# Altium PCB RC car PCB.PcbDoc
Units mm, origin at the board's own origin, x right, y up, seen from the top; angles counter-clockwise.
Board outline 152.4 x 24.77 mm, 2 copper layers (Top Layer, Bottom Layer); 34 components, 27 nets, 120 pads, 0 vias.
Unrouted connection lines stored in the file: 69.
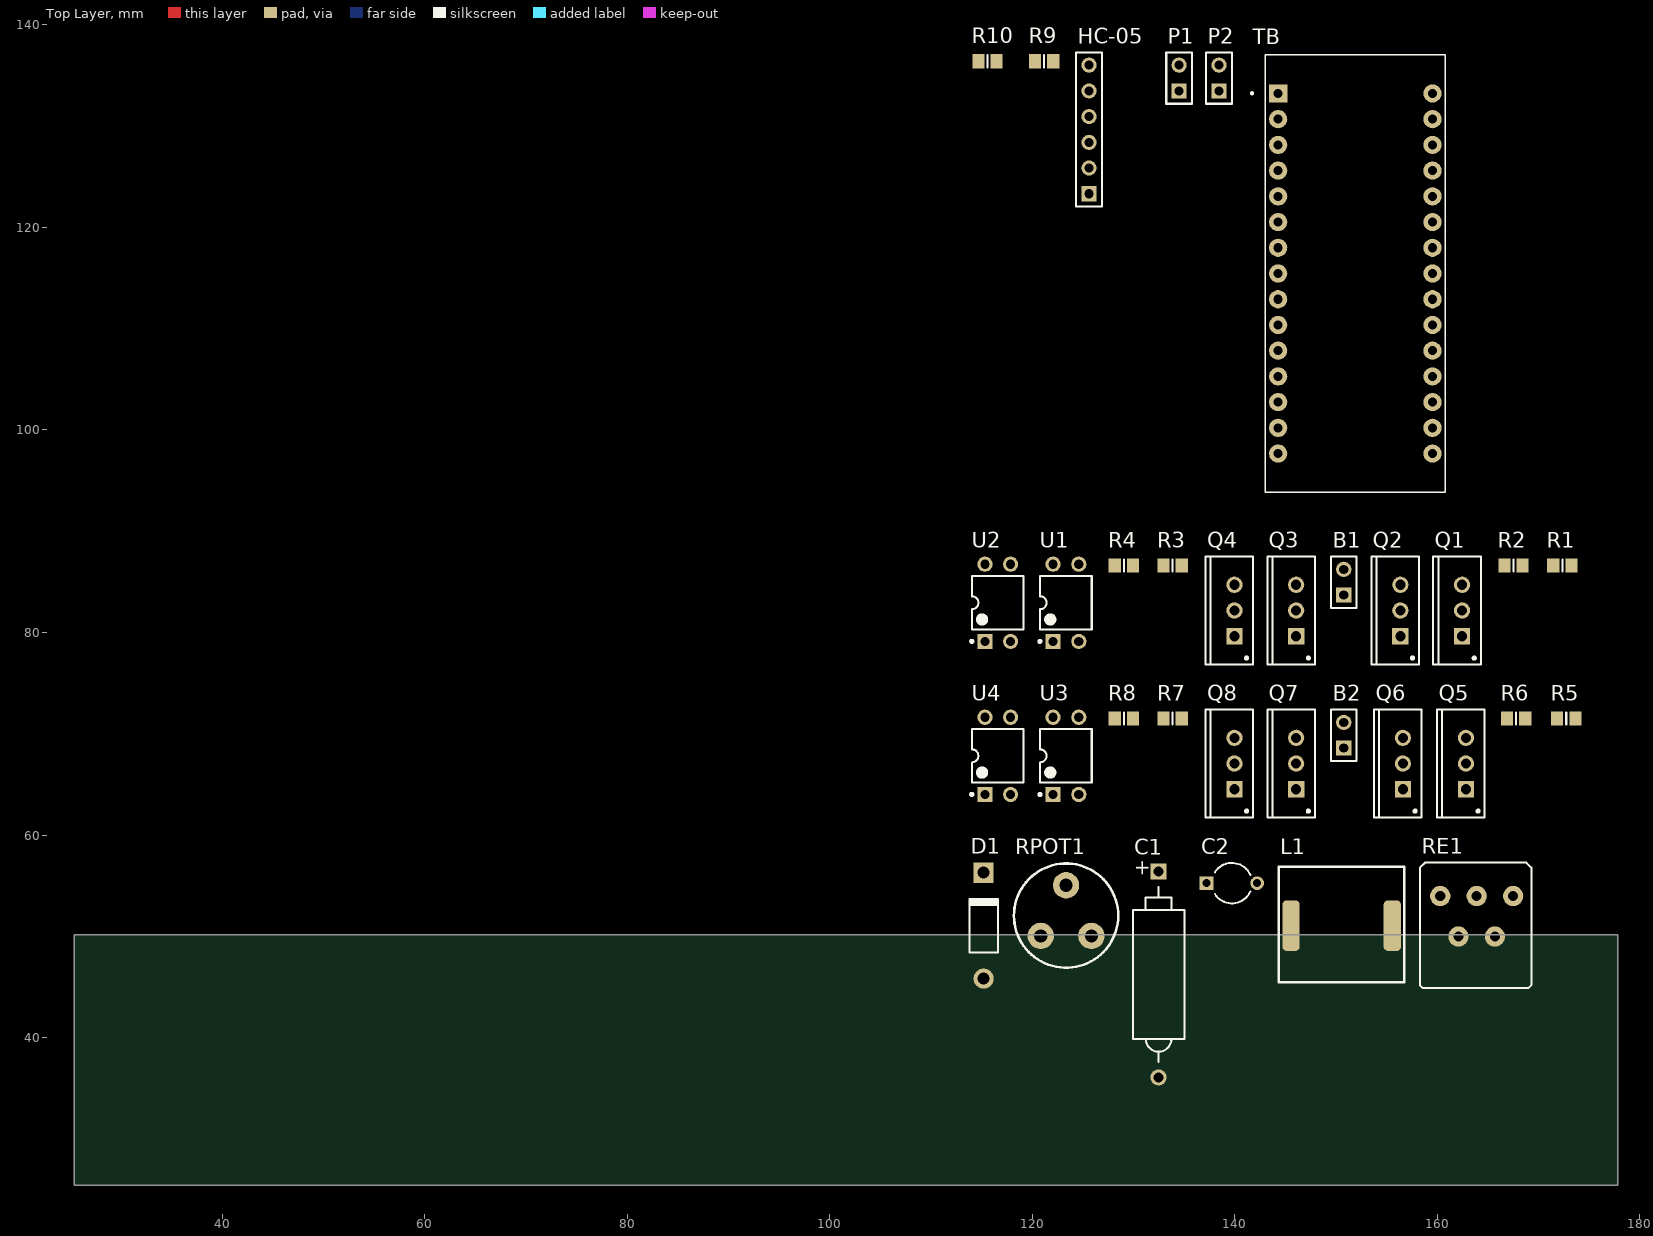
[diagram p0: Top Layer view]
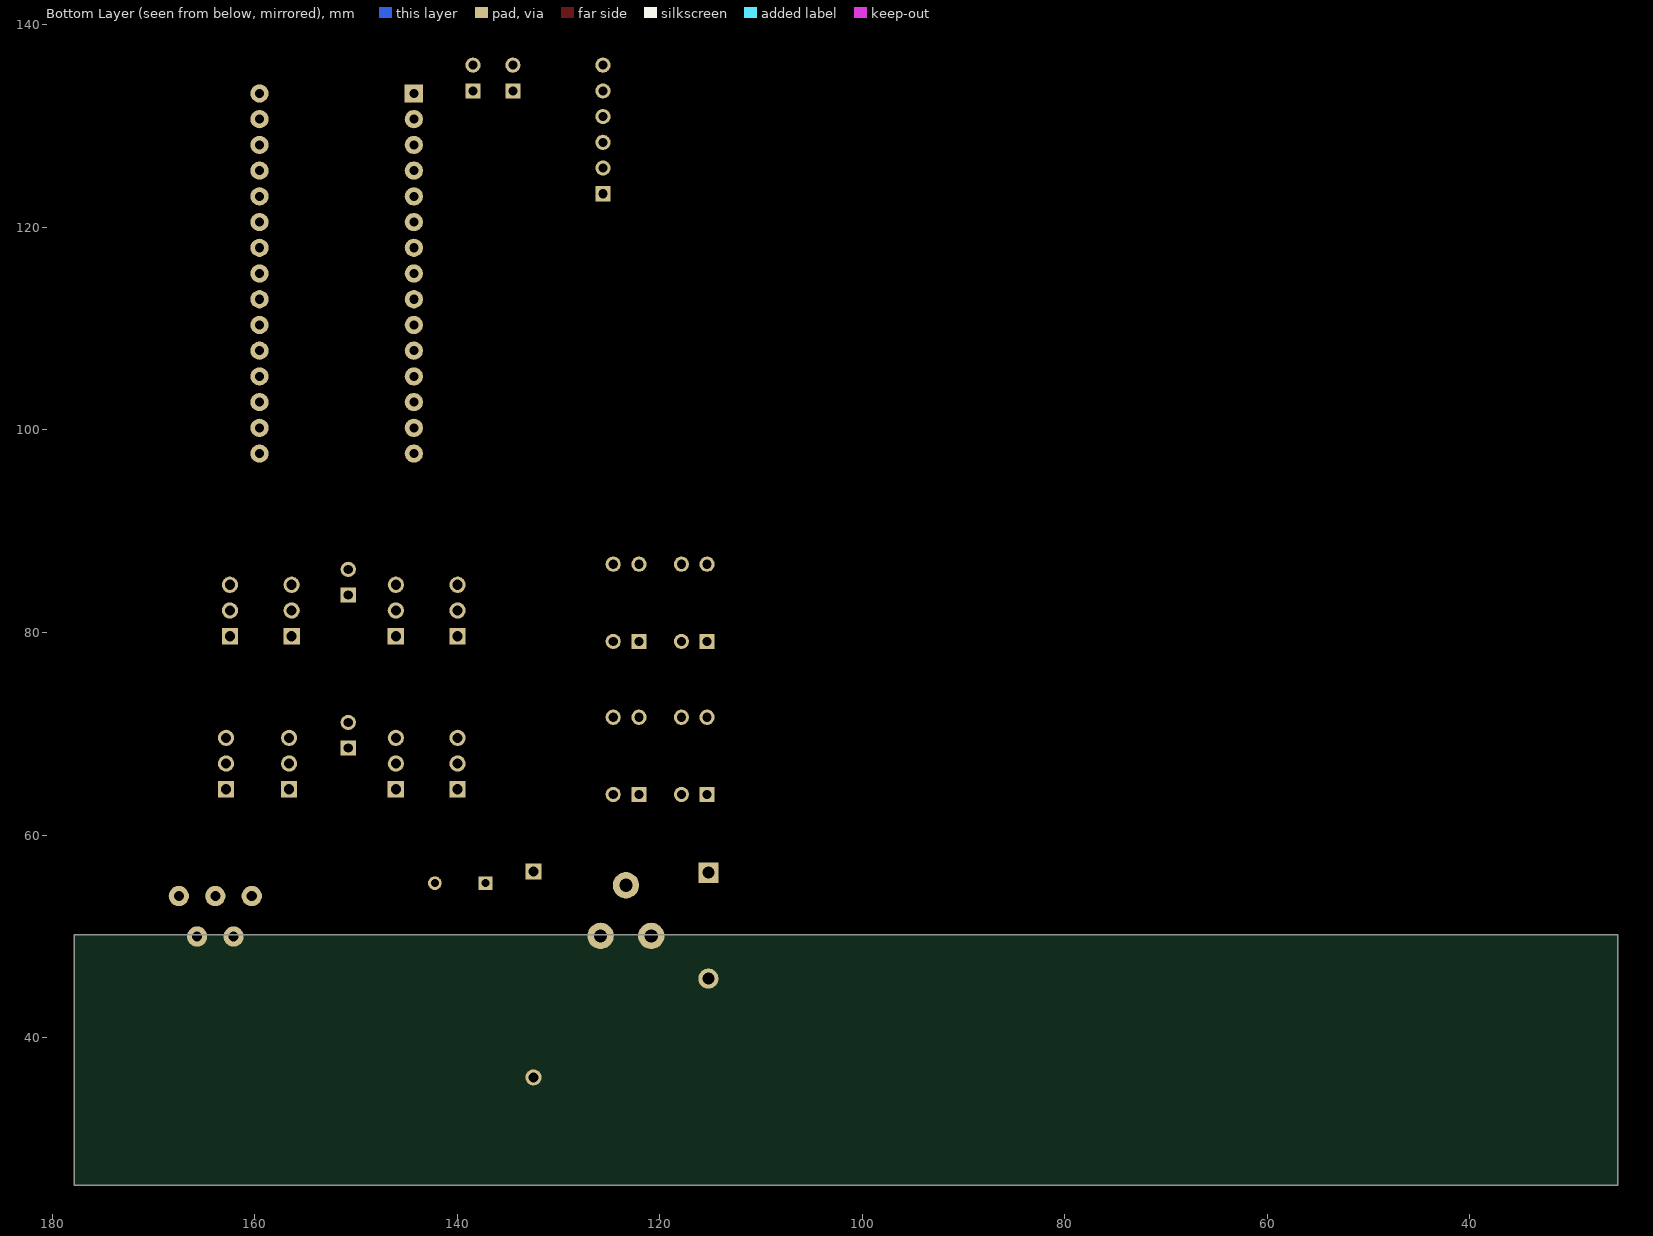
[diagram p1: Bottom Layer view, seen from below]

## Layer stack, top to bottom
Top Solder: solder mask 0.0102, Solder Resist, Dk 3.5
Top Layer: signal copper 0.0356
Dielectric 1: dielectric 0.32, FR-4, Dk 4.8
Bottom Layer: signal copper 0.0356
Bottom Solder: solder mask 0.0102, Solder Resist, Dk 3.5

## Board outline
25.4,25.4 177.8,25.4 177.8,50.165 25.4,50.165

## Design rules (kind name [scope] priority, off if disabled: settings)
Clearance [All] p1: gap=0.254 ignorepadtopadclearanceinfootprint=FALSE except(0: Arc-Hole Track-Hole SMDPad-Hole THPad-Hole Via-Hole Fill-Hole Poly-Hole Region-Hole Text-Hole)
PolygonConnect [All] p1: connectstyle=Relief reliefconductorwidth=0.254 reliefentries=4 polygonreliefangle="90 Angle" airgapwidth=0.254
RoomDefinition "RC Brain Sch" [InComponentClass('RC Brain Sch')] p1: confinementstyle=ConfineIn formatcopy=TRUE lockcomponents=FALSE outline 113.538,91.44 161.29,91.44 161.29,140.081 113.538,140.081
RoomDefinition "H-Bridge turning Sch" [InComponentClass('H-Bridge turning Sch')] p2: confinementstyle=ConfineIn formatcopy=TRUE lockcomponents=FALSE outline 113.538,76.581 174.371,76.581 174.371,90.297 113.538,90.297
RoomDefinition "H-Bridge drive Sch" [InComponentClass('H-Bridge drive Sch')] p3: confinementstyle=ConfineIn formatcopy=TRUE lockcomponents=FALSE outline 113.538,61.468 174.752,61.468 174.752,75.184 113.538,75.184
RoomDefinition "Buck_Converter Sch" [InComponentClass('Buck_Converter Sch')] p4: confinementstyle=ConfineIn formatcopy=TRUE lockcomponents=FALSE outline 113.538,34.925 169.545,34.925 169.545,60.071 113.538,60.071
RoutingVias [All] p1: holewidth=0.711 width=1.27 viastyle="Through Hole" minholewidth=0.711 minwidth=1.27 maxholewidth=0.711 maxwidth=1.27
SolderMaskExpansion [All] p1: expansion=0.102
Width [All] p1: maxlimit=0.254 minlimit=0.254 preferedwidth=0.254
30 further rules are at their usual default settings.

## Classes and differential pairs
component class "RC Brain Sch": HC-05 P1 P2 R9 R10 TB
component class "H-Bridge turning Sch": B1 Q1 Q2 Q3 Q4 R1 R2 R3 R4 U1 U2
component class "H-Bridge drive Sch": B2 Q5 Q6 Q7 Q8 R5 R6 R7 R8 U3 U4
component class "Buck_Converter Sch": C1 C2 D1 L1 RE1 RPOT1

## Components (designator, comment, footprint, x,y, rotation, side; value= is the part's Value field where it differs from the comment)
B1 "Motor" HDR1X2 150.749,83.693 r90 top
B2 "Motor" HDR1X2 150.749,68.58 r90 top
C1 "Cap Pol2" POLAR0.8 132.461,46.228 r90 top value=1mF
C2 "Cap2" CAPR5-4X5 139.7,55.245 r0 top value=100uF
D1 "Diode 11DQ03" DO-204AL 115.189,51.054 r90 top
HC-05 "Header" HDR1X6 125.603,123.317 r90 top
L1 "Inductor SMD 100 uH" "Inductor 100uH" 145.542,51.054 r0 top
P1 "Jumper" HDR1X2 134.493,133.477 r90 top
P2 "Jumper" HDR1X2 138.43,133.477 r90 top
Q1 "PMOS-2" TO-220AB 162.433,82.169 r90 top
Q2 "PMOS-2" TO-220AB 156.337,82.169 r90 top
Q3 "NMOS-2" TO-220AB 146.05,82.169 r90 top
Q4 "NMOS-2" TO-220AB 139.954,82.169 r90 top
Q5 "PMOS-2" TO-220AB 162.814,67.056 r90 top
Q6 "PMOS-2" TO-220AB 156.591,67.056 r90 top
Q7 "NMOS-2" TO-220AB 146.05,67.056 r90 top
Q8 "NMOS-2" TO-220AB 139.954,67.056 r90 top
R1 "Res1" 6-0805_N 172.339,86.614 r0 top value=10k
R2 "Res1" 6-0805_N 167.513,86.614 r0 top value=10k
R3 "Res1" 6-0805_N 133.858,86.614 r0 top value=330
R4 "Res1" 6-0805_N 129.032,86.614 r0 top value=330
R5 "Res1" 6-0805_N 172.72,71.501 r0 top value=10k
R6 "Res1" 6-0805_N 167.767,71.501 r0 top value=10k
R7 "Res1" 6-0805_N 133.858,71.501 r0 top value=330
R8 "Res1" 6-0805_N 129.032,71.501 r0 top value=330
R9 "Res1" 6-0805_N 121.158,136.398 r0 top value=1.8k
R10 "Res1" 6-0805_N 115.57,136.398 r0 top value=1k
RE1 "LM2576HV" LM2576 160.274,53.975 r0 top
RPOT1 "Potentiometer" "Potentiometer 10k" 125.73,50.038 r0 top
TB "ARDUINO_NANO" *SHIELD_ARDUINO_NANO 151.892,115.443 r0 top
U1 "Optoisolator1" DIP-4 123.317,82.931 r90 top
U2 "Optoisolator1" DIP-4 116.586,82.931 r90 top
U3 "Optoisolator1" DIP-4 123.317,67.818 r90 top
U4 "Optoisolator1" DIP-4 116.586,67.818 r90 top

## Footprints (in the part's own frame and the unit in brackets; to place one, negate y for a bottom-side part, rotate by r counter-clockwise, add the part's x,y. Pads: shape width x height; smd on the part's side, far side on the other; paste and mask are expansions set on the pad)
6-0805_N [mm] "Chip Resistor, Body 2.0x1.2mm, IPC Medium Density"
  rect 1.2x1.4 smd: 1(-0.9,0) 2(0.9,0)
  silkscreen extent 0,-0.6 0,0.6, body extent -1.07,-0.7 1.07,0.7, height 0.7
*SHIELD_ARDUINO_NANO [mm]
  rect 1.8x1.8 hole 0.9: 1(-7.62,17.78)
  round 1.8 hole 0.9: 2(-7.62,15.24) 3(-7.62,12.7) 4(-7.62,10.16) 5(-7.62,7.62) 6(-7.62,5.08) 7(-7.62,2.54) 8(-7.62,0) 9(-7.62,-2.54) 10(-7.62,-5.08) 11(-7.62,-7.62) 12(-7.62,-10.16) 13(-7.62,-12.7) 14(-7.62,-15.24) 15(-7.62,-17.78) 16(7.62,-17.78) 17(7.62,-15.24) 18(7.62,-12.7) 19(7.62,-10.16) 20(7.62,-7.62) 21(7.62,-5.08) 22(7.62,-2.54) 23(7.62,0) 24(7.62,2.54) 25(7.62,5.08) 26(7.62,7.62) 27(7.62,10.16) 28(7.62,12.7) 29(7.62,15.24) 30(7.62,17.78)
  silkscreen extent -10.3,-21.59 8.89,21.59, body extent -9.2,21.8 -9.2,21.8, height 0.25
CAPR5-4X5 [mm] "Capacitor; 2 Leads"
  rect 1.35x1.35 hole 0.8: 1(-2.5,0)
  round 1.35 hole 0.8: 2(2.5,0)
  silkscreen extent -1.69,-2 1.82,2
DIP-4 [mm] "DIP; 4 Leads; Row Spacing 7.62 mm; Pitch 2.54 mm"
  rect 1.5x1.5 hole 0.9: 1(-3.81,1.27)
  round 1.5 hole 0.9: 2(-3.81,-1.27) 3(3.81,-1.27) 4(3.81,1.27)
  silkscreen extent -3.93,-2.55 2.65,2.69, body extent -3.15,-2.5 3.15,2.5, height 5.6
DO-204AL [mm] "Diode, Axial; Body 5.2 x 2.7 mm (LxDia. max), Lead Dia. 0.86 mm (max)"
  round 2 hole 1.2: 1(-5.23,0)
  rect 2x2 hole 1.2: 2(5.23,0)
  silkscreen extent -2.65,-1.4 2.75,1.4
HDR1X2 [mm] "Connector; Header; 2 Position"
  rect 1.5x1.5 hole 0.9: 1(0,0)
  round 1.5 hole 0.9: 2(2.54,0)
  silkscreen extent -1.27,-1.27 3.81,1.27
HDR1X6 [mm] "Connector; Header; 6 Position"
  rect 1.5x1.5 hole 0.9: 1(0,0)
  round 1.5 hole 0.9: 2(2.54,0) 3(5.08,0) 4(7.62,0) 5(10.16,0) 6(12.7,0)
  silkscreen extent -1.27,-1.27 13.97,1.27
"Inductor 100uH" [mm] "Inductor 100uH"
  rrect50% 1.7x5 smd: 1(0,0) 1(10,0)
  silkscreen extent -1.2,-5.6 11.2,5.8, body extent -1.25,-6.25 11.25,6.25, height 8.3
LM2576 [mm]
  round 2 hole 1: 1(0,0) 2(1.8,-4) 3(3.6,0) 4(5.4,-4) 5(7.2,0)
  silkscreen extent -2,-9.1 9,3.3, body extent -2,-8 9.1,0.43, height 18
POLAR0.8 [mm] "Polarized Capacitor; 2 Leads"
  rect 1.6x1.6 hole 1: 1(10.16,0)
  round 1.6 hole 1: 2(-10.16,0)
  silkscreen extent -8.64,-2.54 8.64,2.54
"Potentiometer 10k" [mm] "Potentiometer 10k"
  round 2.6 hole 1.3: 1(-4.9,0) 2(0.1,0) 3(-2.4,5)
  silkscreen extent -7.55,-3.15 2.75,7.15, body extent -7.5,-3.3 2.8,7.3, height 6.26
TO-220AB [mm] "TO, Thru-Hole, Vertical, Heatsink Mounted; 3 In-Line Leads; Pitch 2.54 mm"
  rect 1.6x1.6 hole 1: 1(-2.54,0)
  round 1.6 hole 1: 2(0,0) 3(2.54,0)
  silkscreen extent -5.35,-1.85 5.35,2.85, body extent -5.4,-1.9 5.4,2.9, height 19.3

## Part data
B1 B2: "Motor, General Kind", LatestRevisionDate=17-Jul-2002, LatestRevisionNote="Re-released for DXP Platform.", PackageDescription="Capacitor (Radial); 2 Leads", PackageReference=RB5-10.5, Published=24-Mar-1999, Publisher="Altium Limited"
C1: "Polarized Capacitor (Axial)", LatestRevisionDate=17-Jul-2002, LatestRevisionNote="Re-released for DXP Platform.", PackageDescription="Polarized Capacitor; 2 Leads", PackageReference=POLAR0.8, Published=8-Jun-2000, Publisher="Altium Limited"
C2: "Capacitor", PackageDescription="Capacitor; 2 Leads", PackageReference=CAPR5-4X5, Published=23-Sep-2002, Publisher="Altium Limited"
D1: "Schottky Rectifier", Code_JEDEC=DO-204-AL, ComponentLink1Description="Manufacturer Link", ComponentLink1URL=http://www.irf.com/, ComponentLink2Description=Datasheet, ComponentLink2URL=http://www.irf.com/product-info/datasheets/data/11dq03.pdf, DatasheetVersion=Dec-1997, LatestRevisionDate=17-Jul-2002, LatestRevisionNote="Re-released for DXP Platform.", PackageDescription="Diode, Axial; Body 5.2 x 2.7 mm (LxDia. max), Lead Dia. 0.86 mm (max)", PackageReference=DO-204AL, Published=8-Jun-2000, Publisher="Altium Limited"
HC-05: library part "Header 6", "Header, 6-Pin", LatestRevisionDate=17-Jul-2002, LatestRevisionNote="Re-released for DXP Platform.", Publisher="Altium Limited"
P1 P2: library part "Header 2", "Header, 2-Pin", LatestRevisionDate=17-Jul-2002, LatestRevisionNote="Re-released for DXP Platform.", Publisher="Altium Limited"
Q1 Q2 Q5 Q6: "P-Channel Power MOSFET", ComponentLink1Description="Manufacturer Link", ComponentLink1URL=http://www.irf.com/, DatasheetVersion=PD-9.390D, LatestRevisionDate=17-Jul-2002, LatestRevisionNote="Re-released for DXP Platform.", Note="Pin 4 not drawn and electrically connected to Pin 2.", PackageDescription="TO, Thru-Hole, Vertical, Heatsink Mounted; 3 In-Line Leads; Pitch 2.54 mm", PackageReference=TO-220AB, PackageVersion=Feb-1997, Published=8-Jun-2000, Publisher="Altium Limited"
Q3 Q4 Q7 Q8: "N-Channel Power MOSFET", ComponentLink1Description="Manufacturer Link", ComponentLink1URL=http://www.irf.com/, DatasheetVersion=PD-9.814, LatestRevisionDate=17-Jul-2002, LatestRevisionNote="Re-released for DXP Platform.", Note="Pin 2 is electrically connected to pin 4.", PackageDescription="TO, Thru-Hole, Vertical, Heatsink Mounted; 3 In-Line Leads; Pitch 2.54 mm", PackageReference=TO-220AB, PackageVersion=Feb-1997, Published=8-Jun-2000, Publisher="Altium Limited"
R1 R2 R3 R4 R5 R6 R7 R8 R9 R10: "Resistor", LatestRevisionDate=17-Jul-2002, LatestRevisionNote="Re-released for DXP Platform.", PackageDescription="Axial Device, Thru-Hole; 2 Leads; 0.3 in Pin Spacing", PackageReference=AXIAL-0.3, Published=8-Jun-2000, Publisher="Altium Limited"
RPOT1: "potentiometer 10k"
TB: "ATmega328 Arduino Nano AVR® ATmega AVR MCU 8-Bit Embedded Evaluation Board", Package=None, Availability=Unavailable, MF=Arduino, MP="ARDUINO NANO", Price=None, SnapEDA_Link=https://www.snapeda.com/parts/ARDUINO%20NANO/Arduino/view-part/1128261/?ref=snap
U1 U2 U3 U4: "4-Pin Phototransistor Optocoupler", DatasheetVersion=Nov-2003, LatestRevisionDate=04-Mar-2005, LatestRevisionNote="Sch pins 3 & 4 Swapped.", PackageReference=DIP-4, Published=24-Mar-1999, Publisher="Altium Limited"

## Nets (pads, with @x,y where several pads share a name; then routed paths per layer and width w, separated by ;. In a path a pad name is that pad's centre, name@x,y a point inside that pad or via, vN(x,y) a via of type N, cw(c..) or ccw(c..) an arc to the next point about the centre after c; other vN are vias at no path point)
+9: C2.1 Q1.3 Q2.3 Q5.3 Q6.3 R1.2 R2.2 R5.2 R6.2 RE1.1
B_5V: C1.1 L1.1 RPOT1.2 TB.30
D5_PWM: R4.2 TB.8
D6_PWM: R3.2 TB.9
D9_PWM: R8.2 TB.12
D10_PWM: R7.2 TB.13
GND: C1.2 C2.2 D1.1 HC-05.3 Q3.3 Q4.3 Q7.3 Q8.3 R10.1 RE1.3 RE1.5 TB.4 U1.2 U1.3 U2.2 U2.3 U3.2 U3.3 U4.2 U4.3
HC_RX: P1.1 R9.2
HC_TX: HC-05.4 P2.1
HC_VCC: HC-05.2 TB.27
NANO_RX: P2.2 TB.2
NANO_TX: P1.2 TB.1
NetB1_1: B1.1 Q1.2 Q3.2
NetB1_2: B1.2 Q2.2 Q4.2
NetB2_1: B2.1 Q5.2 Q7.2
NetB2_2: B2.2 Q6.2 Q8.2
NetD1_2: D1.2 RE1.2
NetHC-05_5: HC-05.5 R9.1 R10.2
NetQ1_1: Q1.1 Q3.1 R2.1 U2.4
NetQ2_1: Q2.1 Q4.1 R1.1 U1.4
NetQ5_1: Q5.1 Q7.1 R6.1 U4.4
NetQ6_1: Q6.1 Q8.1 R5.1 U3.4
NetR3_1: R3.1 U1.1
NetR4_1: R4.1 U2.1
NetR7_1: R7.1 U3.1
NetR8_1: R8.1 U4.1
NetRE1_4: RE1.4 RPOT1.3
pads on no net: HC-05.1 HC-05.6 RPOT1.1 TB.3 TB.5 TB.6 TB.7 TB.10 TB.11 TB.14 TB.15 TB.16 TB.17 TB.18 TB.19 TB.20 TB.21 TB.22 TB.23 TB.24 TB.25 TB.26 TB.28 TB.29

## Text inside footprints (layer, text, board x,y; h text height)
C1: Top Overlay "+" at 131.511,55.88 h1.5 r90